# Altium PCB TempPres.PcbDoc
Units mil, origin at the board's own origin, x right, y up, seen from the top; angles counter-clockwise.
Board outline 6000 x 4000 mil, 2 copper layers (Top Layer, Bottom Layer); 6 components, 4 nets, 25 pads, 4 vias.
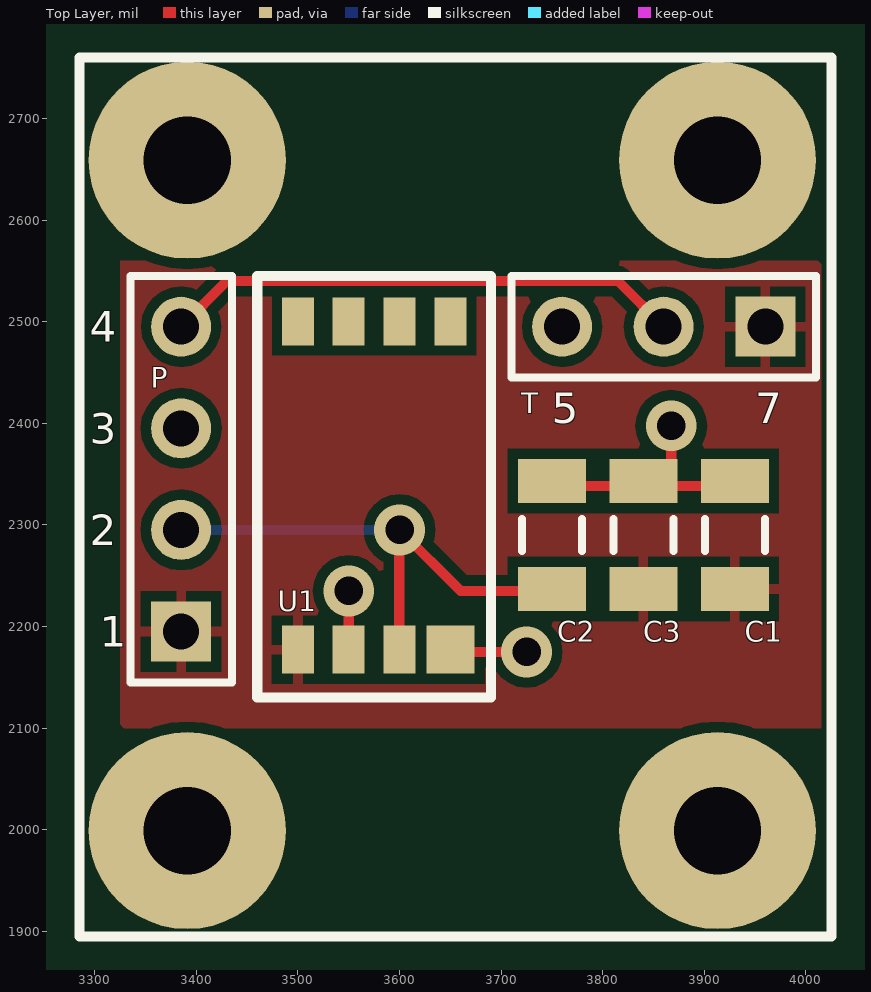
[diagram p0: Top Layer view]
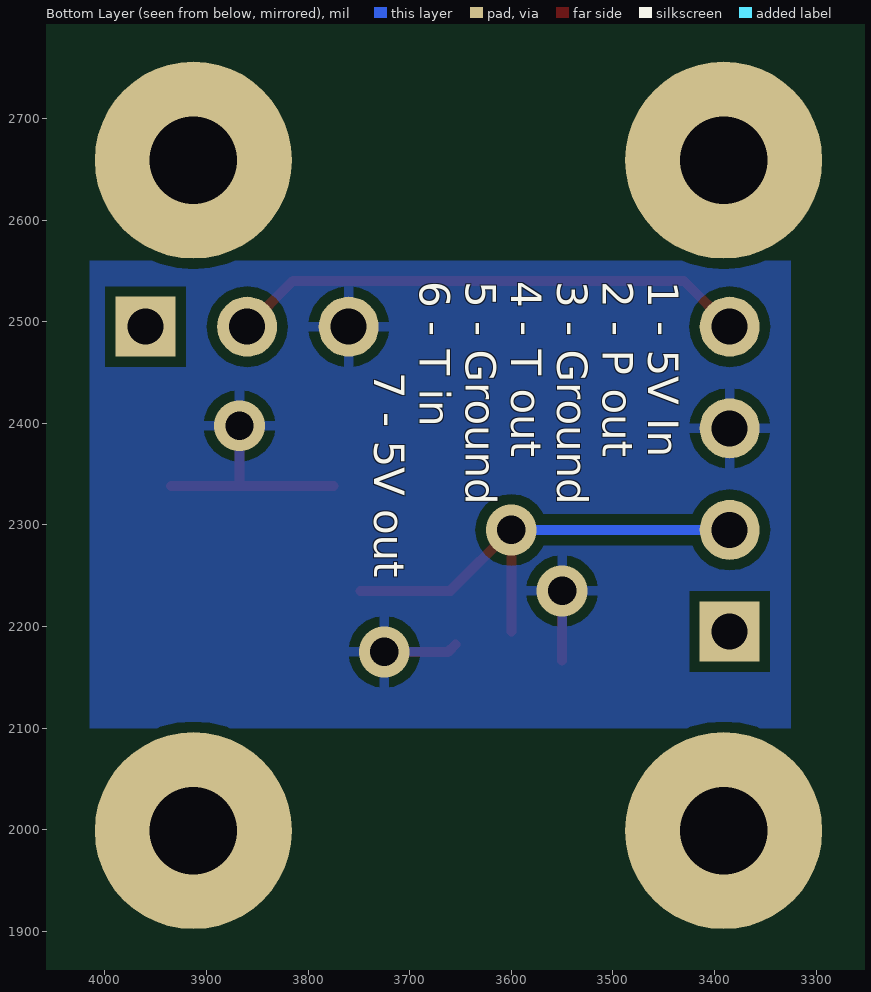
[diagram p1: Bottom Layer view, seen from below]

## Layer stack, top to bottom
Top Solder: solder mask 0.4, Solder Resist, Dk 3.5
Top Layer: signal copper 1.4
Dielectric 1: dielectric 12.6, FR-4, Dk 4.8
Bottom Layer: signal copper 1.4
Bottom Solder: solder mask 0.4, Solder Resist, Dk 3.5

## Board outline
1000,1000 7000,1000 7000,5000 1000,5000

## Design rules (kind name [scope] priority, off if disabled: settings)
Clearance [All] p1: gap=10
PolygonConnect [All] p1: connectstyle=Relief reliefconductorwidth=10 reliefentries=4 polygonreliefangle="90 Angle" airgapwidth=10
RoutingVias [All] p1: holewidth=28 width=50 viastyle="Through Hole" minholewidth=28 minwidth=50 maxholewidth=28 maxwidth=50
SolderMaskExpansion [All] p1: expansion=4
UnpouredPolygon [All] p1: allowunpoured=FALSE
Width [All] p1: maxlimit=10 minlimit=10 preferedwidth=10
29 further rules are at their usual default settings.

## Classes and differential pairs
component class TempPres: C1 P T U1 ""

## Components (designator, comment, footprint, x,y, rotation, side; value= is the part's Value field where it differs from the comment)
C1 "Cap Semi" C1206 3930,2290 r90 top
C2 "Cap Semi" C1206 3750,2290 r270 top
C3 "Cap Semi" C1206 3840,2290 r90 top
P "Pressure" HDR1X4 3385,2195 r90 top
T "Temperature" HDR1X3 3960,2495 r180 top
U1 "Pressure" KP-234 3500,2500 r270 top

## Footprints (in the part's own frame and the unit in brackets; to place one, negate y for a bottom-side part, rotate by r counter-clockwise, add the part's x,y. Pads: shape width x height; smd on the part's side, far side on the other; paste and mask are expansions set on the pad)
C1206 [mm] "Chip Capacitor, Body 3.2x1.6mm, IPC High Density"
  rect 1.1x1.7 smd: 1(-1.35,0) 2(1.35,0)
  silkscreen extent -0.4,-0.75 0.4,0.75, body extent -1.7,-0.9 1.7,0.9, height 1.3
HDR1X3 [mm] "Connector; Header; 3 Position"
  rect 1.5x1.5 hole 0.9: 1(0,0)
  round 1.5 hole 0.9: 2(2.54,0) 3(5.08,0)
  silkscreen extent -1.27,-1.27 6.35,1.27
HDR1X4 [mm] "Connector; Header; 4 Position"
  rect 1.5x1.5 hole 0.9: 1(0,0)
  round 1.5 hole 0.9: 2(2.54,0) 3(5.08,0) 4(7.62,0)
  silkscreen extent -1.27,-1.27 8.89,1.27
KP-234 [mm]
  rect 1.2x0.8 smd: 1(0,3.81) 2(0,2.54) 3(0,1.27) 4(0,0) 5(8.2,0) 6(8.2,1.27) 7(8.2,2.54)
  rect 1.2x1.2 smd: 8(8.2,3.81)
  silkscreen extent -1.14,-1.02 9.4,4.83

## Part data
C1 C2 C3: "Capacitor (Semiconductor SIM Model)"
P: library part "Header 4H", "Header, 4-Pin, Right Angle"
T: library part "Header 3", "Header, 3-Pin"
U1: library part Component_1

## Free pads (board coordinates)
  round 194 hole 86: 0(3391,1999) 0(3391,2659) 0(3912.94,1999) 0(3912.94,2659)

## Via types
v1: diameter 50, hole 28, Top Layer to Bottom Layer, 4 vias

## Nets (pads, with @x,y where several pads share a name; then routed paths per layer and width w, separated by ;. In a path a pad name is that pad's centre, name@x,y a point inside that pad or via, vN(x,y) a via of type N, cw(c..) or ccw(c..) an arc to the next point about the centre after c; other vN are vias at no path point)
GND: C1.2 C2.1 C3.2 P.3 T.3 U1.6 U1.8 | length 360.7
  Top Layer w10: U1.6@3550,2166.58 U1.6 v1(3550,2235) ; U1.8@3655,2182.17 3662.17,2175 v1(3725,2175) ; C2.1@3775,2338.15 C3.2@3867.5,2338.15 ; v1(3867.5,2397.5) C3.2@3867.5,2338.15 ; C1.2@3935,2338.15 C3.2@3867.5,2338.15
OUTP: C2.2 P.2 U1.7 | length 487.8
  Top Layer w10: U1.7@3599.69,2195.31 3599.69,2294.69 v1(3600,2295) 3660,2235 C2.2@3748.15,2235
  Bottom Layer w10: P.2 v1(3600,2295)
OUTT: P.4 T.2 | length 512.3
  Top Layer w10: P.4 3430,2540 3815,2540 T.2
VDD5V: C1.1 C3.1 P.1 T.1 U1.5
pads on no net: U1.1 U1.2 U1.3 U1.4

## Polygon pours and split planes (outlines as drawn)
VDD5V on Top Layer "VDD5V" (solid, pour order 2): 4015,2560 4015,2100 3325,2100 3325,2560
GND on Bottom Layer "GND" (solid, pour order 4): 3325,2560 3325,2100 4015,2100 4015,2560

## Other copper
Top Layer:

## Silkscreen, mask and mechanical layers (free items; w line width, h text height)
Top Overlay:
  lines w10: 3285,1895 3285,2760 4025,2760 4025,1895 3285,1895
  text "4" at 3295,2480 h30
  text "5" at 3750,2400 h30
  text "7" at 3950,2400 h30
  text "3" at 3295,2380 h30
  text "2" at 3295,2280 h30
  text "1" at 3305,2180 h30
Bottom Overlay:
  text "1 - 5V In" at 3465,2540 h30 r90
  text "2 - P out" at 3510,2540 h30 r90
  text "3 - Ground" at 3555,2540 h30 r90
  text "4 - T out" at 3600,2540 h30 r90
  text "5 - Ground" at 3645,2540 h30 r90
  text "6 - T in" at 3690,2540 h30 r90
  text "7 - 5V out" at 3735,2450 h30 r90